# EAGLE board Kord Kontroller PCB 0.2 (EAGLE 9.2.2), part 1 of 2
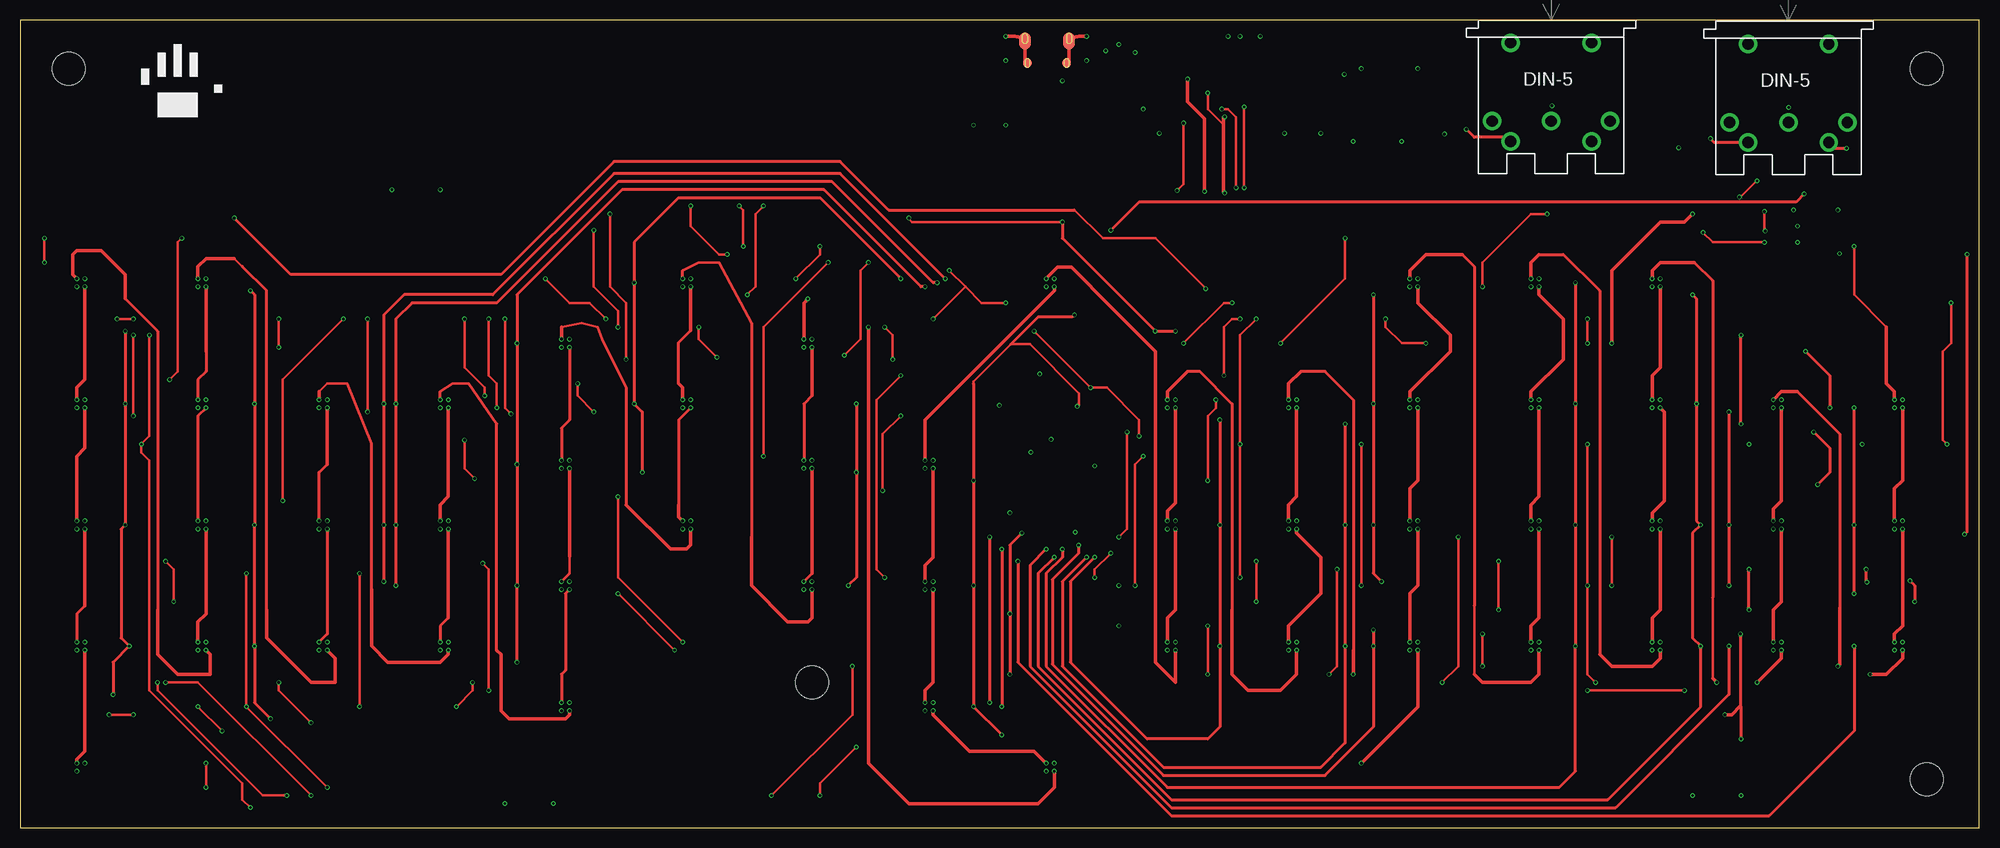
[diagram p0: board, top side]
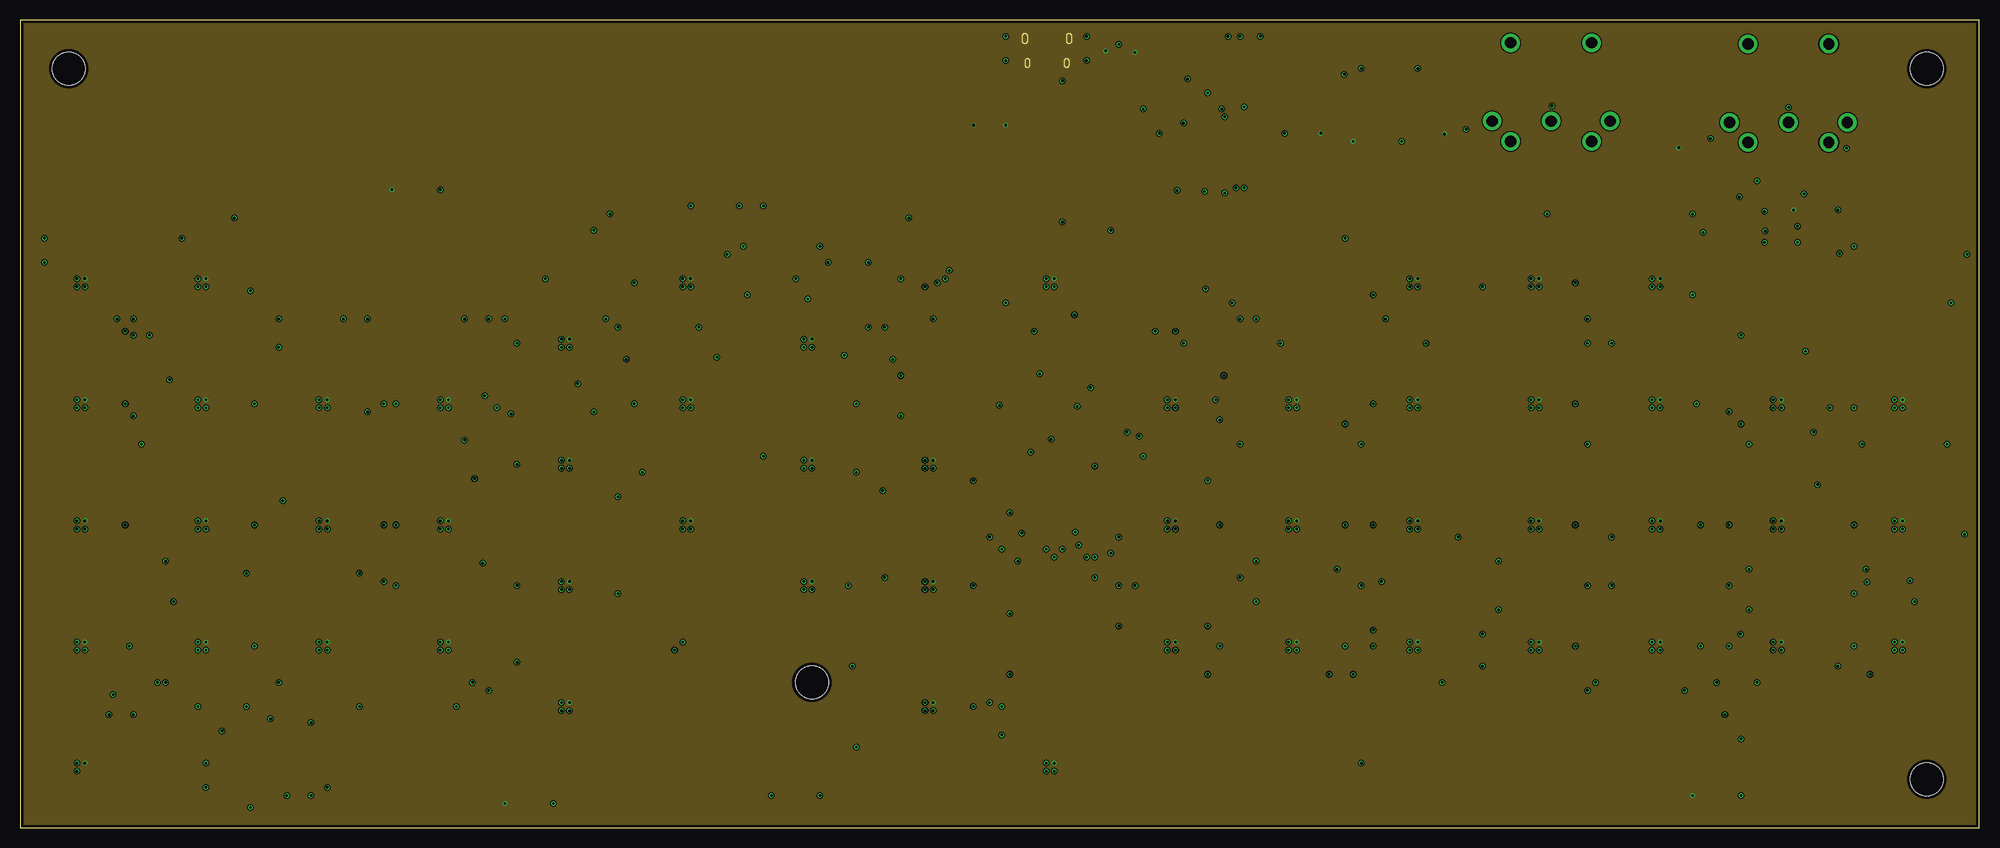
[diagram p1: board, inner layer VDD]
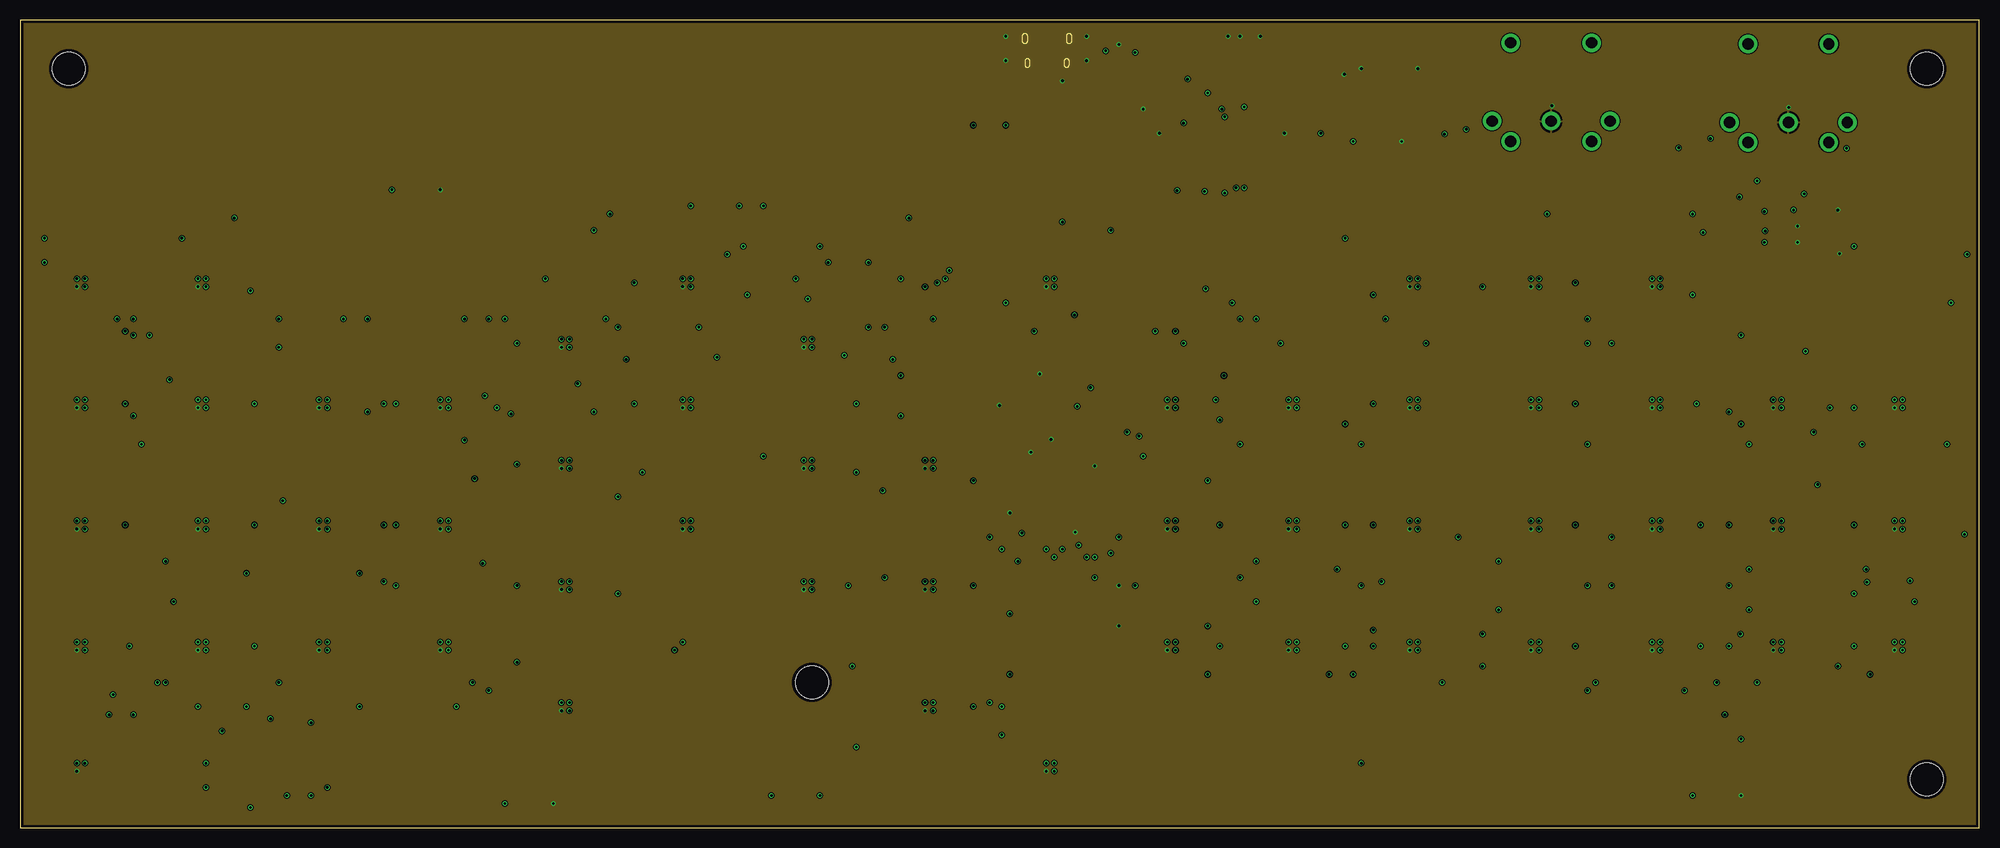
[diagram p2: board, inner layer GND]
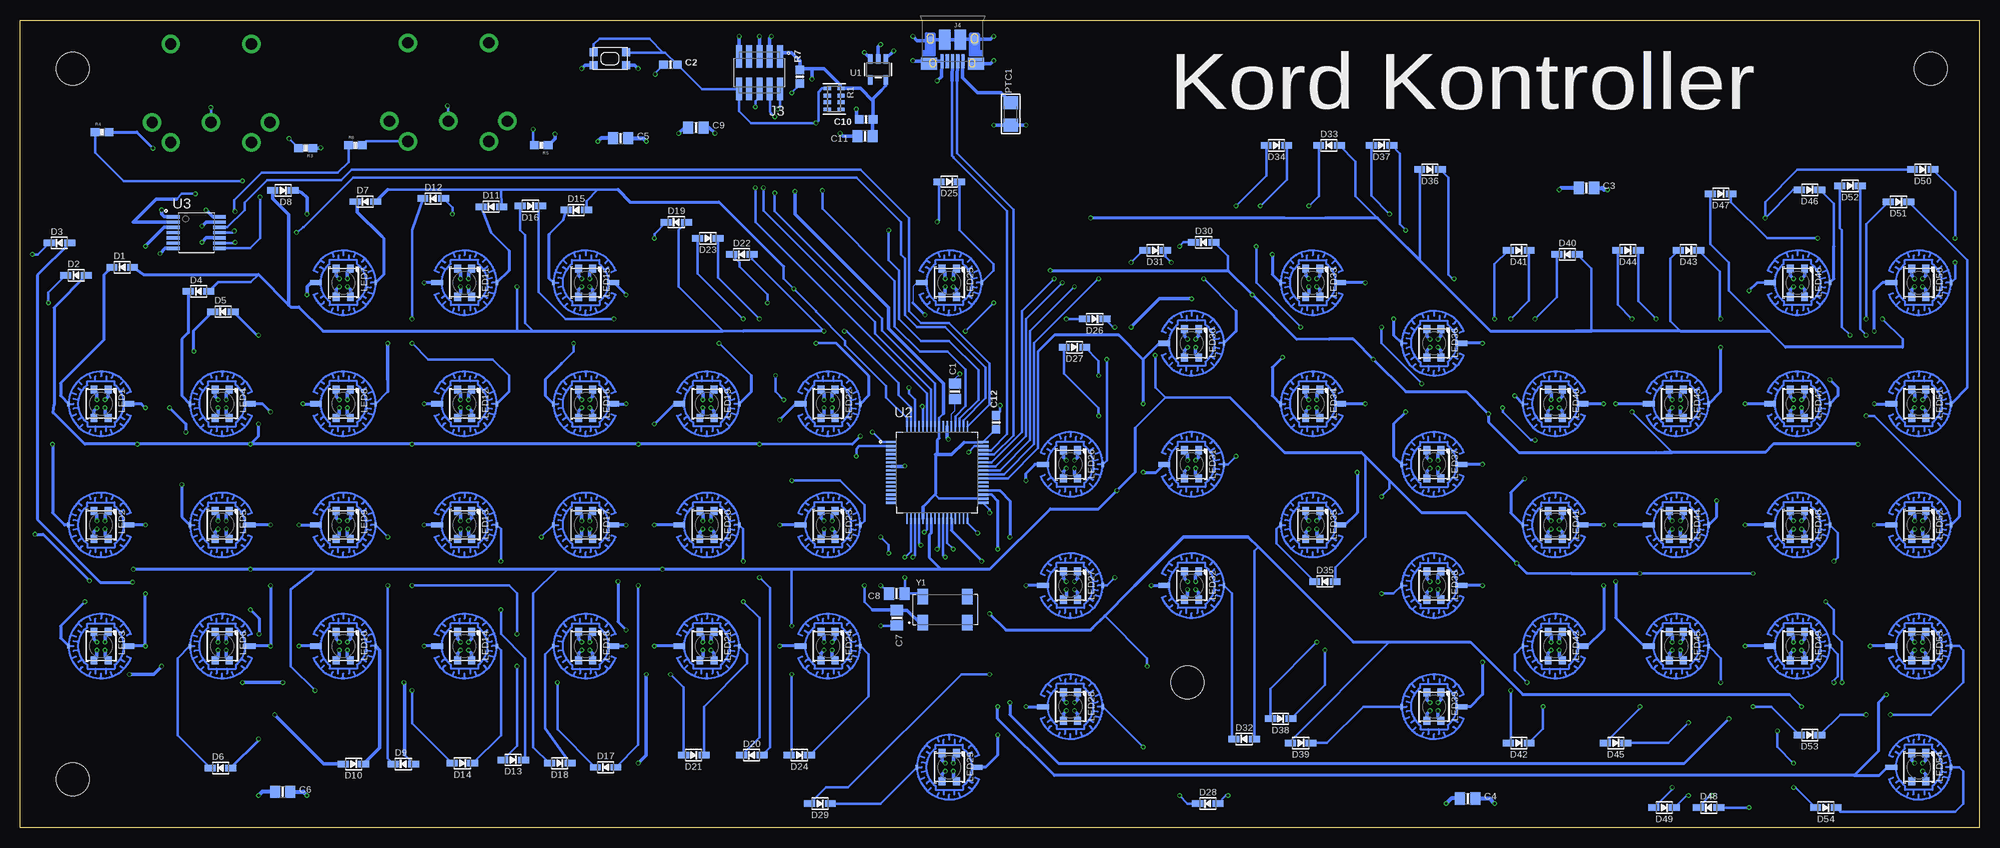
[diagram p3: board, bottom side, seen from below]

Size 242.5 x 100 mm. Coordinates in mm from the lower left corner, seen from the top.
Outline: 0,0 242.5,0 242.5,100 0,100 0,0
Copper layers (1*2*15*16): Top 0.035559375mm / dielectric 0.17018125mm / VDD 0.01778125mm / dielectric 47mil / GND 0.01778125mm / dielectric 0.17018125mm / Bottom 0.035559375mm
Design rules "oshpark4layer *": minimum track width 5mil, minimum drill 10mil, track to track 5mil, track to pad 5mil, pad to pad 5mil, via to via 5mil, smd to smd 5mil, copper to edge 15mil, drill to drill 6mil, minimum pad ring 4mil, minimum via ring 4mil, stop-mask expansion 2.5mil, vias tented up to drill 20mil, thermal gap 10mil
Net classes: 1 power: width 0.406 mm
Holes 4.1 mm at 6,94 236,94 236,6 98,18

## Footprints (pad centres in the part's own frame; a part is rotated, then mirrored left to right if it is on the bottom)
ELAST_PAD_SQUARE_10MM_4X4WIDE = smd 1.45 x 0.635: P$1 -3.4,0 | smd 0.305 x 0.61: P$2 4,0
0805-NO = smd 1.24 x 1.5: 1 -0.95,0; 2 0.95,0
0603-NO = smd 1.075 x 1: 1 -0.85,0; 2 0.85,0
SOD-323 = smd 1.35 x 0.8: A 1.27,0; C -1.27,0
5-PIN-DIN-RA-PCB-NEW = drill 1.4 pad 2.286: 1 7.3,12.5; 2 0,12.5; 3 -7.3,12.5; 4 5,15; 5 -5,15; 6 -5,2.8; 7 5,2.8
SAMTEC_FTSH-105-01-L-DV-K = smd 0.74 x 2.79: 1 -2.54,-2.035; 2 -2.54,2.035; 3 -1.27,-2.035; 4 -1.27,2.035; 5 0,-2.035; 6 0,2.035; 7 1.27,-2.035; 8 1.27,2.035; 9 2.54,-2.035; 10 2.54,2.035
USB-MICROB-PTH-MILL = smd 0.4 x 1.75: D+ 0,0; D- -0.65,0; GND 1.3,0; ID 0.65,0; VBUS -1.3,0 | smd 2 x 1.46: SHIELD -2.9,0.275; SHIELD2 2.9,0.275 | smd 1.425 x 2.5: SHIELD3 -0.963,-2.675; SHIELD4 0.963,-2.675 | smd 1.4 x 2.1 bottom: SHIELD5 -2.731,-2.531; SHIELD7 2.729,-2.531 | smd 1 x 1: SHIELD6 2.7,-2.575 | smd 1.1 x 1.5: SHIELD8 -2.731,-2.731 | smd 1 x 1.3 bottom: SHIELD9 -2.43,0.195; SHIELD10 2.43,0.195
LED3535 = smd 1 x 0.85: 1 -1.75,0.875; 2 -1.75,-0.875; 3 1.75,-0.875; 4 1.75,0.875
1206 = smd 1.6 x 1.8: 1 -1.4,0; 2 1.4,0
RESPACK_4X0603 = smd 0.45 x 0.9: 1 -1.3,-0.85; 2 -0.4,-0.85; 3 0.4,-0.85; 4 1.3,-0.85; 5 1.3,0.85; 6 0.4,0.85; 7 -0.4,0.85; 8 -1.3,0.85
0603-RES = smd 1.1 x 1: 1 -0.85,0; 2 0.85,0
KMR2 = smd 1 x 1: 1 2,0.8; 2 2,-0.8; 3 -2,0.8; 4 -2,-0.8
SOT23-5 = smd 0.55 x 1.2: 1 -0.95,-1.3; 2 0,-1.3; 3 0.95,-1.3; 4 0.95,1.3; 5 -0.95,1.3
QFP50P1200X1200X120-64N = smd 1.47 x 0.28: 1 -5.67,3.75; 2 -5.67,3.25; 3 -5.67,2.75; 4 -5.67,2.25; 5 -5.67,1.75; 6 -5.67,1.25; 7 -5.67,0.75; 8 -5.67,0.25; 9 -5.67,-0.25; 10 -5.67,-0.75; 11 -5.67,-1.25; 12 -5.67,-1.75; 13 -5.67,-2.25; 14 -5.67,-2.75; 15 -5.67,-3.25; 16 -5.67,-3.75; 33 5.67,-3.75; 34 5.67,-3.25; 35 5.67,-2.75; 36 5.67,-2.25; 37 5.67,-1.75; 38 5.67,-1.25; 39 5.67,-0.75; 40 5.67,-0.25; 41 5.67,0.25; 42 5.67,0.75; 43 5.67,1.25; 44 5.67,1.75; 45 5.67,2.25; 46 5.67,2.75; 47 5.67,3.25; 48 5.67,3.75 | smd 0.28 x 1.47: 17 -3.75,-5.67; 18 -3.25,-5.67; 19 -2.75,-5.67; 20 -2.25,-5.67; 21 -1.75,-5.67; 22 -1.25,-5.67; 23 -0.75,-5.67; 24 -0.25,-5.67; 25 0.25,-5.67; 26 0.75,-5.67; 27 1.25,-5.67; 28 1.75,-5.67; 29 2.25,-5.67; 30 2.75,-5.67; 31 3.25,-5.67; 32 3.75,-5.67; 49 3.75,5.67; 50 3.25,5.67; 51 2.75,5.67; 52 2.25,5.67; 53 1.75,5.67; 54 1.25,5.67; 55 0.75,5.67; 56 0.25,5.67; 57 -0.25,5.67; 58 -0.75,5.67; 59 -1.25,5.67; 60 -1.75,5.67; 61 -2.25,5.67; 62 -2.75,5.67; 63 -3.25,5.67; 64 -3.75,5.67
SOP65P640X120-14N = smd 1.57 x 0.41: 1 -2.87,1.95; 2 -2.87,1.3; 3 -2.87,0.65; 4 -2.87,0; 5 -2.87,-0.65; 6 -2.87,-1.3; 7 -2.87,-1.95; 8 2.87,-1.95; 9 2.87,-1.3; 10 2.87,-0.65; 11 2.87,0; 12 2.87,0.65; 13 2.87,1.3; 14 2.87,1.95
XTAL_ECS-.327-12.5-17X-TR = smd 1.3 x 1.9: 1 -2.75,-1.6; 2 2.75,-1.6; 3 2.75,1.6; 4 -2.75,1.6

## Placement (x,y rotation side)
B1  ELAST_10X10  [ELAST_PAD_SQUARE_10MM_4X4WIDE]  232.5,52.5 180 bottom
B2  ELAST_10X10  [ELAST_PAD_SQUARE_10MM_4X4WIDE]  232.5,37.5 180 bottom
B3  ELAST_10X10  [ELAST_PAD_SQUARE_10MM_4X4WIDE]  232.5,22.5 180 bottom
B4  ELAST_10X10  [ELAST_PAD_SQUARE_10MM_4X4WIDE]  217.5,52.5 180 bottom
B5  ELAST_10X10  [ELAST_PAD_SQUARE_10MM_4X4WIDE]  217.5,37.5 180 bottom
B6  ELAST_10X10  [ELAST_PAD_SQUARE_10MM_4X4WIDE]  217.5,22.5 180 bottom
B7  ELAST_10X10  [ELAST_PAD_SQUARE_10MM_4X4WIDE]  202.5,67.5 0 bottom
B8  ELAST_10X10  [ELAST_PAD_SQUARE_10MM_4X4WIDE]  202.5,52.5 0 bottom
B9  ELAST_10X10  [ELAST_PAD_SQUARE_10MM_4X4WIDE]  202.5,37.5 0 bottom
B10  ELAST_10X10  [ELAST_PAD_SQUARE_10MM_4X4WIDE]  202.5,22.5 0 bottom
B11  ELAST_10X10  [ELAST_PAD_SQUARE_10MM_4X4WIDE]  187.5,67.5 0 bottom
B12  ELAST_10X10  [ELAST_PAD_SQUARE_10MM_4X4WIDE]  187.5,52.5 0 bottom
B13  ELAST_10X10  [ELAST_PAD_SQUARE_10MM_4X4WIDE]  187.5,37.5 0 bottom
B14  ELAST_10X10  [ELAST_PAD_SQUARE_10MM_4X4WIDE]  187.5,22.5 0 bottom
B15  ELAST_10X10  [ELAST_PAD_SQUARE_10MM_4X4WIDE]  172.5,67.5 180 bottom
B16  ELAST_10X10  [ELAST_PAD_SQUARE_10MM_4X4WIDE]  172.5,52.5 180 bottom
B17  ELAST_10X10  [ELAST_PAD_SQUARE_10MM_4X4WIDE]  172.5,37.5 180 bottom
B18  ELAST_10X10  [ELAST_PAD_SQUARE_10MM_4X4WIDE]  172.5,22.5 180 bottom
B19  ELAST_10X10  [ELAST_PAD_SQUARE_10MM_4X4WIDE]  157.5,52.5 0 bottom
B20  ELAST_10X10  [ELAST_PAD_SQUARE_10MM_4X4WIDE]  157.5,37.5 0 bottom
B21  ELAST_10X10  [ELAST_PAD_SQUARE_10MM_4X4WIDE]  157.5,22.5 0 bottom
B22  ELAST_10X10  [ELAST_PAD_SQUARE_10MM_4X4WIDE]  142.5,52.5 0 bottom
B23  ELAST_10X10  [ELAST_PAD_SQUARE_10MM_4X4WIDE]  142.5,37.5 0 bottom
B24  ELAST_10X10  [ELAST_PAD_SQUARE_10MM_4X4WIDE]  142.5,22.5 0 bottom
B25  ELAST_10X10  [ELAST_PAD_SQUARE_10MM_4X4WIDE]  127.5,67.5 0 bottom
B26  ELAST_10X10  [ELAST_PAD_SQUARE_10MM_4X4WIDE]  112.5,45 0 bottom
B27  ELAST_10X10  [ELAST_PAD_SQUARE_10MM_4X4WIDE]  112.5,30 0 bottom
B28  ELAST_10X10  [ELAST_PAD_SQUARE_10MM_4X4WIDE]  112.5,15 0 bottom
B29  ELAST_10X10  [ELAST_PAD_SQUARE_10MM_4X4WIDE]  127.5,7.5 180 bottom
B30  ELAST_10X10  [ELAST_PAD_SQUARE_10MM_4X4WIDE]  97.5,60 0 bottom
B31  ELAST_10X10  [ELAST_PAD_SQUARE_10MM_4X4WIDE]  97.5,45 0 bottom
B32  ELAST_10X10  [ELAST_PAD_SQUARE_10MM_4X4WIDE]  97.5,30 0 bottom
B33  ELAST_10X10  [ELAST_PAD_SQUARE_10MM_4X4WIDE]  82.5,67.5 180 bottom
B34  ELAST_10X10  [ELAST_PAD_SQUARE_10MM_4X4WIDE]  82.5,52.5 180 bottom
B35  ELAST_10X10  [ELAST_PAD_SQUARE_10MM_4X4WIDE]  82.5,37.5 180 bottom
B36  ELAST_10X10  [ELAST_PAD_SQUARE_10MM_4X4WIDE]  67.5,60 180 bottom
B37  ELAST_10X10  [ELAST_PAD_SQUARE_10MM_4X4WIDE]  67.5,45 180 bottom
B38  ELAST_10X10  [ELAST_PAD_SQUARE_10MM_4X4WIDE]  67.5,30 180 bottom
B39  ELAST_10X10  [ELAST_PAD_SQUARE_10MM_4X4WIDE]  67.5,15 180 bottom
B40  ELAST_10X10  [ELAST_PAD_SQUARE_10MM_4X4WIDE]  52.5,52.5 180 bottom
B41  ELAST_10X10  [ELAST_PAD_SQUARE_10MM_4X4WIDE]  52.5,37.5 180 bottom
B42  ELAST_10X10  [ELAST_PAD_SQUARE_10MM_4X4WIDE]  52.5,22.5 180 bottom
B43  ELAST_10X10  [ELAST_PAD_SQUARE_10MM_4X4WIDE]  37.5,52.5 0 bottom
B44  ELAST_10X10  [ELAST_PAD_SQUARE_10MM_4X4WIDE]  37.5,37.5 0 bottom
B45  ELAST_10X10  [ELAST_PAD_SQUARE_10MM_4X4WIDE]  37.5,22.5 0 bottom
B46  ELAST_10X10  [ELAST_PAD_SQUARE_10MM_4X4WIDE]  22.5,67.5 0 bottom
B47  ELAST_10X10  [ELAST_PAD_SQUARE_10MM_4X4WIDE]  22.5,52.5 0 bottom
B48  ELAST_10X10  [ELAST_PAD_SQUARE_10MM_4X4WIDE]  22.5,37.5 0 bottom
B49  ELAST_10X10  [ELAST_PAD_SQUARE_10MM_4X4WIDE]  22.5,22.5 0 bottom
B50  ELAST_10X10  [ELAST_PAD_SQUARE_10MM_4X4WIDE]  7.5,67.5 0 bottom
B51  ELAST_10X10  [ELAST_PAD_SQUARE_10MM_4X4WIDE]  7.5,52.5 0 bottom
B52  ELAST_10X10  [ELAST_PAD_SQUARE_10MM_4X4WIDE]  7.5,37.5 0 bottom
B53  ELAST_10X10  [ELAST_PAD_SQUARE_10MM_4X4WIDE]  7.5,22.5 0 bottom
B54  ELAST_10X10  [ELAST_PAD_SQUARE_10MM_4X4WIDE]  7.5,7.5 0 bottom
C1  10uF  [0805-NO]  126.8,54.05 90 bottom
C2  0.1uF  [0603-NO]  162,94.5 0 bottom
C3  10u  [0805-NO]  48.63,79.23 0 bottom
C4  10u  [0805-NO]  63.33,3.63 0 bottom
C5  10u  [0805-NO]  168.18,85.38 0 bottom
C6  10u  [0805-NO]  210.01,4.46 0 bottom
C7  10uF  [0805-NO]  134,26 270 bottom
C8  10uF  [0805-NO]  134,29 180 bottom
C9  10µF  [0805-NO]  158.86,86.71 0 bottom
C10  1uF  [0603-NO]  137.79,87.71 180 bottom
C11  10µF  [0805-NO]  137.92,85.63 180 bottom
C12  1uF  [0603-NO]  121.7,50.2 90 bottom
D1  1N4148  [SOD-323]  229.87,69.41 0 bottom
D2  1N4148  [SOD-323]  235.57,68.41 0 bottom
D3  1N4148  [SOD-323]  237.65,72.41 0 bottom
D4  1N4148  [SOD-323]  220.41,66.41 0 bottom
D5  1N4148  [SOD-323]  217.39,63.91 0 bottom
D6  1N4148  [SOD-323]  217.69,7.41 0 bottom
D7  1N4148  [SOD-323]  199.78,77.53 0 bottom
D8  1N4148  [SOD-323]  209.96,78.91 180 bottom
D9  1N4148  [SOD-323]  195.06,7.91 0 bottom
D10  1N4148  [SOD-323]  201.24,7.91 180 bottom
D11  1N4148  [SOD-323]  184.2,76.91 0 bottom
D12  1N4148  [SOD-323]  191.38,77.91 0 bottom
D13  1N4148  [SOD-323]  181.48,8.41 180 bottom
D14  1N4148  [SOD-323]  187.76,7.99 180 bottom
D15  1N4148  [SOD-323]  173.68,76.49 0 bottom
D16  1N4148  [SOD-323]  179.36,76.99 180 bottom
D17  1N4148  [SOD-323]  170.04,7.49 0 bottom
D18  1N4148  [SOD-323]  175.72,7.99 180 bottom
D19  1N4148  [SOD-323]  161.28,74.99 0 bottom
D20  1N4148  [SOD-323]  151.96,8.99 0 bottom
D21  1N4148  [SOD-323]  159.14,8.99 180 bottom
D22  1N4148  [SOD-323]  153.2,70.99 0 bottom
D23  1N4148  [SOD-323]  157.38,72.99 180 bottom
D24  1N4148  [SOD-323]  146.06,8.99 180 bottom
D25  1N4148  [SOD-323]  127.5,80 180 bottom
D26  1N4148  [SOD-323]  109.5,63 180 bottom
D27  1N4148  [SOD-323]  112,59.5 180 bottom
D28  1N4148  [SOD-323]  95.5,3 0 bottom
D29  1N4148  [SOD-323]  143.5,3 180 bottom
D30  1N4148  [SOD-323]  96,72.5 0 bottom
D31  1N4148  [SOD-323]  102,71.5 180 bottom
D32  1N4148  [SOD-323]  91,11 0 bottom
D33  1N4148  [SOD-323]  80.5,84.5 0 bottom
D34  1N4148  [SOD-323]  87,84.5 180 bottom
D35  1N4148  [SOD-323]  81,30.5 0 bottom
D36  1N4148  [SOD-323]  68,81.5 180 bottom
D37  1N4148  [SOD-323]  74,84.5 180 bottom
D38  1N4148  [SOD-323]  86.5,13.5 180 bottom
D39  1N4148  [SOD-323]  84,10.5 180 bottom
D40  1N4148  [SOD-323]  51,71 0 bottom
D41  1N4148  [SOD-323]  57,71.5 180 bottom
D42  1N4148  [SOD-323]  57,10.5 180 bottom
D43  1N4148  [SOD-323]  36,71.5 180 bottom
D44  1N4148  [SOD-323]  43.5,71.5 180 bottom
D45  1N4148  [SOD-323]  45,10.5 180 bottom
D46  1N4148  [SOD-323]  21,79 180 bottom
D47  1N4148  [SOD-323]  32,78.5 180 bottom
D48  1N4148  [SOD-323]  33.5,2.5 0 bottom
D49  1N4148  [SOD-323]  39,2.5 180 bottom
D50  1N4148  [SOD-323]  7,81.5 180 bottom
D51  1N4148  [SOD-323]  10,77.5 180 bottom
D52  1N4148  [SOD-323]  16,79.5 180 bottom
D53  1N4148  [SOD-323]  21,11.5 180 bottom
D54  1N4148  [SOD-323]  19,2.5 180 bottom
J1  MIDIOUTB  [5-PIN-DIN-RA-PCB-NEW]  189.5,100 180 top
J2  MIDIOUTA  [5-PIN-DIN-RA-PCB-NEW]  218.87,99.85 180 top
J3  FTSH-105-01-L-DV-KJ  [SAMTEC_FTSH-105-01-L-DV-K]  151,93.5 180 bottom
J4  [USB-MICROB-PTH-MILL]  127.1,94.9 180 bottom
LED1  WS2812B3535  [LED3535]  232.5,52.5 270 bottom
LED2  WS2812B3535  [LED3535]  232.5,37.5 270 bottom
LED3  WS2812B3535  [LED3535]  232.5,22.5 270 bottom
LED4  WS2812B3535  [LED3535]  217.5,52.5 270 bottom
LED5  WS2812B3535  [LED3535]  217.5,37.5 270 bottom
LED6  WS2812B3535  [LED3535]  217.5,22.5 270 bottom
LED7  WS2812B3535  [LED3535]  202.5,67.5 270 bottom
LED8  WS2812B3535  [LED3535]  202.5,52.5 270 bottom
LED9  WS2812B3535  [LED3535]  202.5,37.5 270 bottom
LED10  WS2812B3535  [LED3535]  202.5,22.5 270 bottom
LED11  WS2812B3535  [LED3535]  187.5,67.5 270 bottom
LED12  WS2812B3535  [LED3535]  187.5,52.5 270 bottom
LED13  WS2812B3535  [LED3535]  187.5,37.5 270 bottom
LED14  WS2812B3535  [LED3535]  187.5,22.5 270 bottom
LED15  WS2812B3535  [LED3535]  172.5,67.5 270 bottom
LED16  WS2812B3535  [LED3535]  172.5,52.5 270 bottom
LED17  WS2812B3535  [LED3535]  172.5,37.5 270 bottom
LED18  WS2812B3535  [LED3535]  172.5,22.5 270 bottom
LED19  WS2812B3535  [LED3535]  157.5,52.5 270 bottom
LED20  WS2812B3535  [LED3535]  157.5,37.5 270 bottom
LED21  WS2812B3535  [LED3535]  157.5,22.5 270 bottom
LED22  WS2812B3535  [LED3535]  142.5,52.5 270 bottom
LED23  WS2812B3535  [LED3535]  142.5,37.5 270 bottom
LED24  WS2812B3535  [LED3535]  142.5,22.5 270 bottom
LED25  WS2812B3535  [LED3535]  127.5,67.5 270 bottom
LED26  WS2812B3535  [LED3535]  112.5,45 270 bottom
LED27  WS2812B3535  [LED3535]  112.5,30 270 bottom
LED28  WS2812B3535  [LED3535]  112.5,15 270 bottom
LED29  WS2812B3535  [LED3535]  127.5,7.5 270 bottom
LED30  WS2812B3535  [LED3535]  97.5,60 270 bottom
LED31  WS2812B3535  [LED3535]  97.5,45 270 bottom
LED32  WS2812B3535  [LED3535]  97.5,30 270 bottom
LED33  WS2812B3535  [LED3535]  82.5,67.5 270 bottom
LED34  WS2812B3535  [LED3535]  82.5,52.5 270 bottom
LED35  WS2812B3535  [LED3535]  82.5,37.5 270 bottom
LED36  WS2812B3535  [LED3535]  67.5,60 270 bottom
LED37  WS2812B3535  [LED3535]  67.5,45 270 bottom
LED38  WS2812B3535  [LED3535]  67.5,30 270 bottom
LED39  WS2812B3535  [LED3535]  67.5,15 270 bottom
LED40  WS2812B3535  [LED3535]  52.5,52.5 270 bottom
LED41  WS2812B3535  [LED3535]  52.5,37.5 270 bottom
LED42  WS2812B3535  [LED3535]  52.5,22.5 270 bottom
LED43  WS2812B3535  [LED3535]  37.5,52.5 270 bottom
LED44  WS2812B3535  [LED3535]  37.5,37.5 270 bottom
LED45  WS2812B3535  [LED3535]  37.5,22.5 270 bottom
LED46  WS2812B3535  [LED3535]  22.5,67.5 270 bottom
LED47  WS2812B3535  [LED3535]  22.5,52.5 270 bottom
LED48  WS2812B3535  [LED3535]  22.5,37.5 270 bottom
LED49  WS2812B3535  [LED3535]  22.5,22.5 270 bottom
LED50  WS2812B3535  [LED3535]  7.5,67.5 270 bottom
LED51  WS2812B3535  [LED3535]  7.5,52.5 270 bottom
LED52  WS2812B3535  [LED3535]  7.5,37.5 270 bottom
LED53  WS2812B3535  [LED3535]  7.5,22.5 270 bottom
LED54  WS2812B3535  [LED3535]  7.5,7.5 270 bottom
PTC1  500mA Fuse  [1206]  119.89,88.38 90 bottom
R1  10K  [RESPACK_4X0603]  141.75,90.25 270 bottom
R3  220  [0603-RES]  207.17,84.15 180 bottom
R4  220  [0603-RES]  232.36,86.15 0 bottom
R5  220  [0603-RES]  178,84.5 180 bottom
R6  220  [0603-RES]  201,84.5 0 bottom
R7  10K  [0603-NO]  146,93 90 bottom
SW2  SPST_TACT-KMR2  [KMR2]  169.5,95.25 0 bottom
U1  AP2112K-3.3  [SOT23-5]  136.31,93.9 180 bottom
U2  ATSAMD51J19A-AUT  [QFP50P1200X1200X120-64N]  129,44 0 bottom
U3  SN74LV4T125PWR  [SOP65P640X120-14N]  220.7,73.7 0 bottom
Y1  ECS-.327-12.5-17X-TR  [XTAL_ECS-.327-12.5-17X-TR]  128,27 0 bottom

## Library data of the parts
B1-B54 C1-C12 D1-D54 LED1-LED54 PTC1 R1 R7 U1 = microbuilder
J1 J2 = Testing; PROD_ID: CONN-09481
J3 = FTSH-105-01-L-DV-K; AVAILABILITY: Unavailable; DESCRIPTION: Conn Unshrouded Header HDR 10 POS 1.27mm Solder ST SMD Automotive Tube; MF: Samtec; MP: FTSH-105-01-L-DV-K; PACKAGE: TSSOP-20 Texas Instruments; PRICE: None
J4 = SparkFun-Connectors; PROD_ID: CONN-13711
R3-R6 = SparkFun-Resistors; PROD_ID: RES-07861
SW2 = adafruit
U2 = ATSAMD51J19A-AUT; AVAILABILITY: Unavailable; DESCRIPTION: 120Mhz 512Kb F 64 Tqfp Pkg T Nr 85Ct 64 Tqfp 10 10 1 T/R; MF: Microchip; MP: ATSAMD51J19A-AUT; PACKAGE: TQFP-64 Microchip; PRICE: None
U3 = SN74LV4T125PWR; DESCRIPTION: Buffer, Non-Inverting 4 Element 1 Bit per Element 3-State Output 14-TSSOP; DIGI-KEY_PART_NUMBER: 296-40545-1-ND; DIGI-KEY_PURCHASE_URL: https://www.digikey.com/product-detail/en/texas-instruments/SN74LV4T125PWR/296-40545-1-ND/5178422?utm_source=snapeda&utm_medium=aggregator&utm_campaign=symbol; MF: Texas Instruments; MP: SN74LV4T125PWR; PACKAGE: TSSOP-14 Texas Instruments
Y1 = ECS-.327-12.5-17X-TR; DESCRIPTION: 32.768kHz ±20ppm Crystal 12.5pF 50 kOhms 4-SOJ, 5.50mm pitch; DIGI-KEY_PART_NUMBER: XC1195CT-ND; DIGI-KEY_PURCHASE_URL: https://www.digikey.com/product-detail/en/ecs-inc/ECS-.327-12.5-17X-TR/XC1195CT-ND/827659?utm_source=snapeda&utm_medium=aggregator&utm_campaign=symbol; MF: ECS Inc.; MP: ECS-.327-12.5-17X-TR; PACKAGE: 4-4 ECS International

## Nets
3.3V: C10.1 C11.1 C12.1 J3.1 R1.8 R7.2 U1.5 U2.21 U2.34 U2.48 U2.56
COL0: B1.P$1 B2.P$1 B3.P$1 U2.28
COL1: B4.P$1 B5.P$1 B6.P$1 U2.27
COL2: B7.P$1 B8.P$1 B9.P$1 B10.P$1 U2.26
COL3: B11.P$1 B12.P$1 B13.P$1 B14.P$1 U2.25
COL4: B15.P$1 B16.P$1 B17.P$1 B18.P$1 U2.20
COL5: B19.P$1 B20.P$1 B21.P$1 U2.19
COL6: B22.P$1 B23.P$1 B24.P$1 U2.18
COL7: B25.P$1 B26.P$1 B27.P$1 B28.P$1 B29.P$1 U2.60
COL8: B30.P$1 B31.P$1 B32.P$1 U2.39
COL9: B33.P$1 B34.P$1 B35.P$1 U2.40
COL10: B36.P$1 B37.P$1 B38.P$1 B39.P$1 U2.41
COL11: B40.P$1 B41.P$1 B42.P$1 U2.42
COL12: B43.P$1 B44.P$1 B45.P$1 U2.43
COL13: B46.P$1 B47.P$1 B48.P$1 B49.P$1 U2.36
COL14: B50.P$1 B51.P$1 B52.P$1 B53.P$1 B54.P$1 U2.35
D+: J4.D+ U2.46
D-: J4.D- U2.45
GND: C1.2 C2.1 C3.1 C4.1 C5.1 C6.1 C7.2 C8.2 C9.2 C10.2 C11.2 C12.2 J1.2 J2.2 J3.3 J3.5 J3.9 J4.GND J4.SHIELD J4.SHIELD2 J4.SHIELD3 J4.SHIELD4 J4.SHIELD5 J4.SHIELD6 J4.SHIELD7 J4.SHIELD8 J4.SHIELD9 J4.SHIELD10 LED1.4 LED2.4 LED3.4 LED4.4 LED5.4 LED6.4 LED7.4 LED8.4 LED9.4 LED10.4 LED11.4 LED12.4 LED13.4 LED14.4 LED15.4 LED16.4 LED17.4 LED18.4 LED19.4 LED20.4 LED21.4 LED22.4 LED23.4 LED24.4 LED25.4 LED26.4 LED27.4 LED28.4 LED29.4 LED30.4 LED31.4 LED32.4 LED33.4 LED34.4 LED35.4 LED36.4 LED37.4 LED38.4 LED39.4 LED40.4 LED41.4 LED42.4 LED43.4 LED44.4 LED45.4 LED46.4 LED47.4 LED48.4 LED49.4 LED50.4 LED51.4 LED52.4 LED53.4 LED54.4 SW2.2 SW2.4 U1.2 U2.7 U2.22 U2.33 U2.47 U2.54 U3.1 U3.7 U3.10 U3.13
LEVELSHIFT_3V: U2.51 U3.2
LEVELSHIFT_5V: LED1.1 U3.3
MIDIOUTA_3V: U2.50 U3.9
MIDIOUTA_5V: R4.1 U3.8
MIDIOUTB_3V: U2.49 U3.12
MIDIOUTB_5V: R6.1 U3.11
N$1: J1.5 R6.2
N$2: J1.4 R5.2
N$3: LED36.3 LED37.1
N$4: B7.P$2 D7.C
N$5: B11.P$2 D11.C
N$6: B1.P$2 D1.C
N$7: LED17.3 LED18.1
N$8: LED18.3 LED19.1
N$9: B4.P$2 D4.C
N$10: LED19.3 LED20.1
N$11: LED1.3 LED2.1
N$12: LED2.3 LED3.1
N$13: LED3.3 LED4.1
N$14: LED4.3 LED5.1
N$15: B8.P$2 D8.C
N$16: LED5.3 LED6.1
N$17: LED6.3 LED7.1
N$18: B12.P$2 D12.C
N$19: LED7.3 LED8.1
N$20: B2.P$2 D2.C
N$21: LED8.3 LED9.1
N$22: B5.P$2 D5.C
N$23: B9.P$2 D9.C
N$24: B13.P$2 D13.C
N$25: B3.P$2 D3.C
N$26: B6.P$2 D6.C
N$27: B10.P$2 D10.C
N$28: B14.P$2 D14.C
N$29: LED9.3 LED10.1
N$30: LED10.3 LED11.1
N$31: LED11.3 LED12.1
N$32: LED12.3 LED13.1
N$33: LED13.3 LED14.1
N$34: LED14.3 LED15.1
N$35: LED15.3 LED16.1
N$36: LED20.3 LED21.1
N$37: LED21.3 LED22.1
N$38: LED22.3 LED23.1
N$39: LED23.3 LED24.1
N$40: LED24.3 LED25.1
N$41: LED25.3 LED26.1
N$42: LED26.3 LED27.1
N$43: LED28.3 LED29.1
N$44: LED27.3 LED28.1
N$45: LED29.3 LED30.1
N$46: LED30.3 LED31.1
N$47: LED31.3 LED32.1
N$48: B15.P$2 D15.C
N$49: LED34.3 LED35.1
N$50: LED35.3 LED36.1
N$51: LED44.3 LED45.1
N$52: B16.P$2 D16.C
N$53: B19.P$2 D19.C
N$54: B22.P$2 D22.C
N$55: LED43.3 LED44.1
N$56: B17.P$2 D17.C
N$57: B20.P$2 D20.C
N$58: B23.P$2 D23.C
N$59: LED42.3 LED43.1
N$60: B18.P$2 D18.C
N$61: B21.P$2 D21.C
N$62: B24.P$2 D24.C
N$64: LED16.3 LED17.1
N$65: LED50.3 LED51.1
N$67: LED51.3 LED52.1
N$68: LED52.3 LED53.1
N$70: B29.P$2 D29.C
N$73: B25.P$2 D25.C
N$75: B33.P$2 D33.C
N$76: B36.P$2 D36.C
N$81: B26.P$2 D26.C
N$82: B30.P$2 D30.C
N$83: B34.P$2 D34.C
N$84: B37.P$2 D37.C
N$85: B27.P$2 D27.C
N$86: B31.P$2 D31.C
N$87: B35.P$2 D35.C
N$88: B38.P$2 D38.C
N$89: LED33.3 LED34.1
N$93: LED37.3 LED38.1
N$94: LED38.3 LED39.1
N$95: LED39.3 LED40.1
N$96: LED41.3 LED42.1
N$100: LED45.3 LED46.1
N$101: LED46.3 LED47.1
N$102: LED47.3 LED48.1
N$103: LED49.3 LED50.1
N$107: LED53.3 LED54.1
N$110: J2.5 R4.2
N$111: LED40.3 LED41.1
N$112: LED48.3 LED49.1
N$113: LED32.3 LED33.1
N$114: J2.4 R3.2
N$117: B46.P$2 D46.C
N$118: B50.P$2 D50.C
N$119: B40.P$2 D40.C
N$120: B43.P$2 D43.C
N$121: B47.P$2 D47.C
N$122: B51.P$2 D51.C
N$123: B41.P$2 D41.C
N$124: B44.P$2 D44.C
N$125: B48.P$2 D48.C
N$126: B52.P$2 D52.C
N$127: B42.P$2 D42.C
N$128: B45.P$2 D45.C
N$129: B49.P$2 D49.C
N$130: B53.P$2 D53.C
N$131: B28.P$2 D28.C
N$132: B32.P$2 D32.C
N$134: B39.P$2 D39.C
N$138: B54.P$2 D54.C
NRESET: C2.2 J3.10 R1.1 SW2.1 SW2.3 U2.52
OSCIN: C8.1 U2.1 Y1.4
OSCOUT: C7.1 U2.2 Y1.1
ROW0: D7.A D11.A D15.A D46.A D50.A U2.64
ROW1: D1.A D4.A D8.A D12.A D16.A D19.A D22.A D25.A D33.A D36.A D40.A D43.A D47.A D51.A U2.63
ROW2: D2.A D5.A D9.A D13.A D17.A D20.A D23.A D26.A D30.A D34.A D37.A D41.A D44.A D48.A D52.A U2.62
ROW3: D3.A D6.A D10.A D14.A D18.A D21.A D24.A D27.A D31.A D35.A D38.A D42.A D45.A D49.A D53.A U2.23
ROW4: D28.A D29.A D32.A D39.A D54.A U2.32
SWDCLK: J3.4 R7.1 U2.57
SWDIO: J3.2 U2.58
SWO: J3.6 U2.59
VBUS: J4.VBUS PTC1.2
VDD [power]: C3.2 C4.2 C5.2 C6.2 C9.1 LED1.2 LED2.2 LED3.2 LED4.2 LED5.2 LED6.2 LED7.2 LED8.2 LED9.2 LED10.2 LED11.2 LED12.2 LED13.2 LED14.2 LED15.2 LED16.2 LED17.2 LED18.2 LED19.2 LED20.2 LED21.2 LED22.2 LED23.2 LED24.2 LED25.2 LED26.2 LED27.2 LED28.2 LED29.2 LED30.2 LED31.2 LED32.2 LED33.2 LED34.2 LED35.2 LED36.2 LED37.2 LED38.2 LED39.2 LED40.2 LED41.2 LED42.2 LED43.2 LED44.2 LED45.2 LED46.2 LED47.2 LED48.2 LED49.2 LED50.2 LED51.2 LED52.2 LED53.2 LED54.2 PTC1.1 R3.1 R5.1 U1.1 U1.3 U3.14
VDDANA: U2.8
VDDCORE1: C1.1 U2.53
VSW: U2.55